# Altium PCB PCB1.PcbDoc
Units mm, origin at the board's own origin, x right, y up, seen from the top; angles counter-clockwise.
Board outline 42.85 x 42.85 mm, 4 copper layers (Component Side, Ground Plane, Power Plane, Solder Side), stack 0.844 mm thick; 31 components, 23 nets, 109 pads, 268 vias.
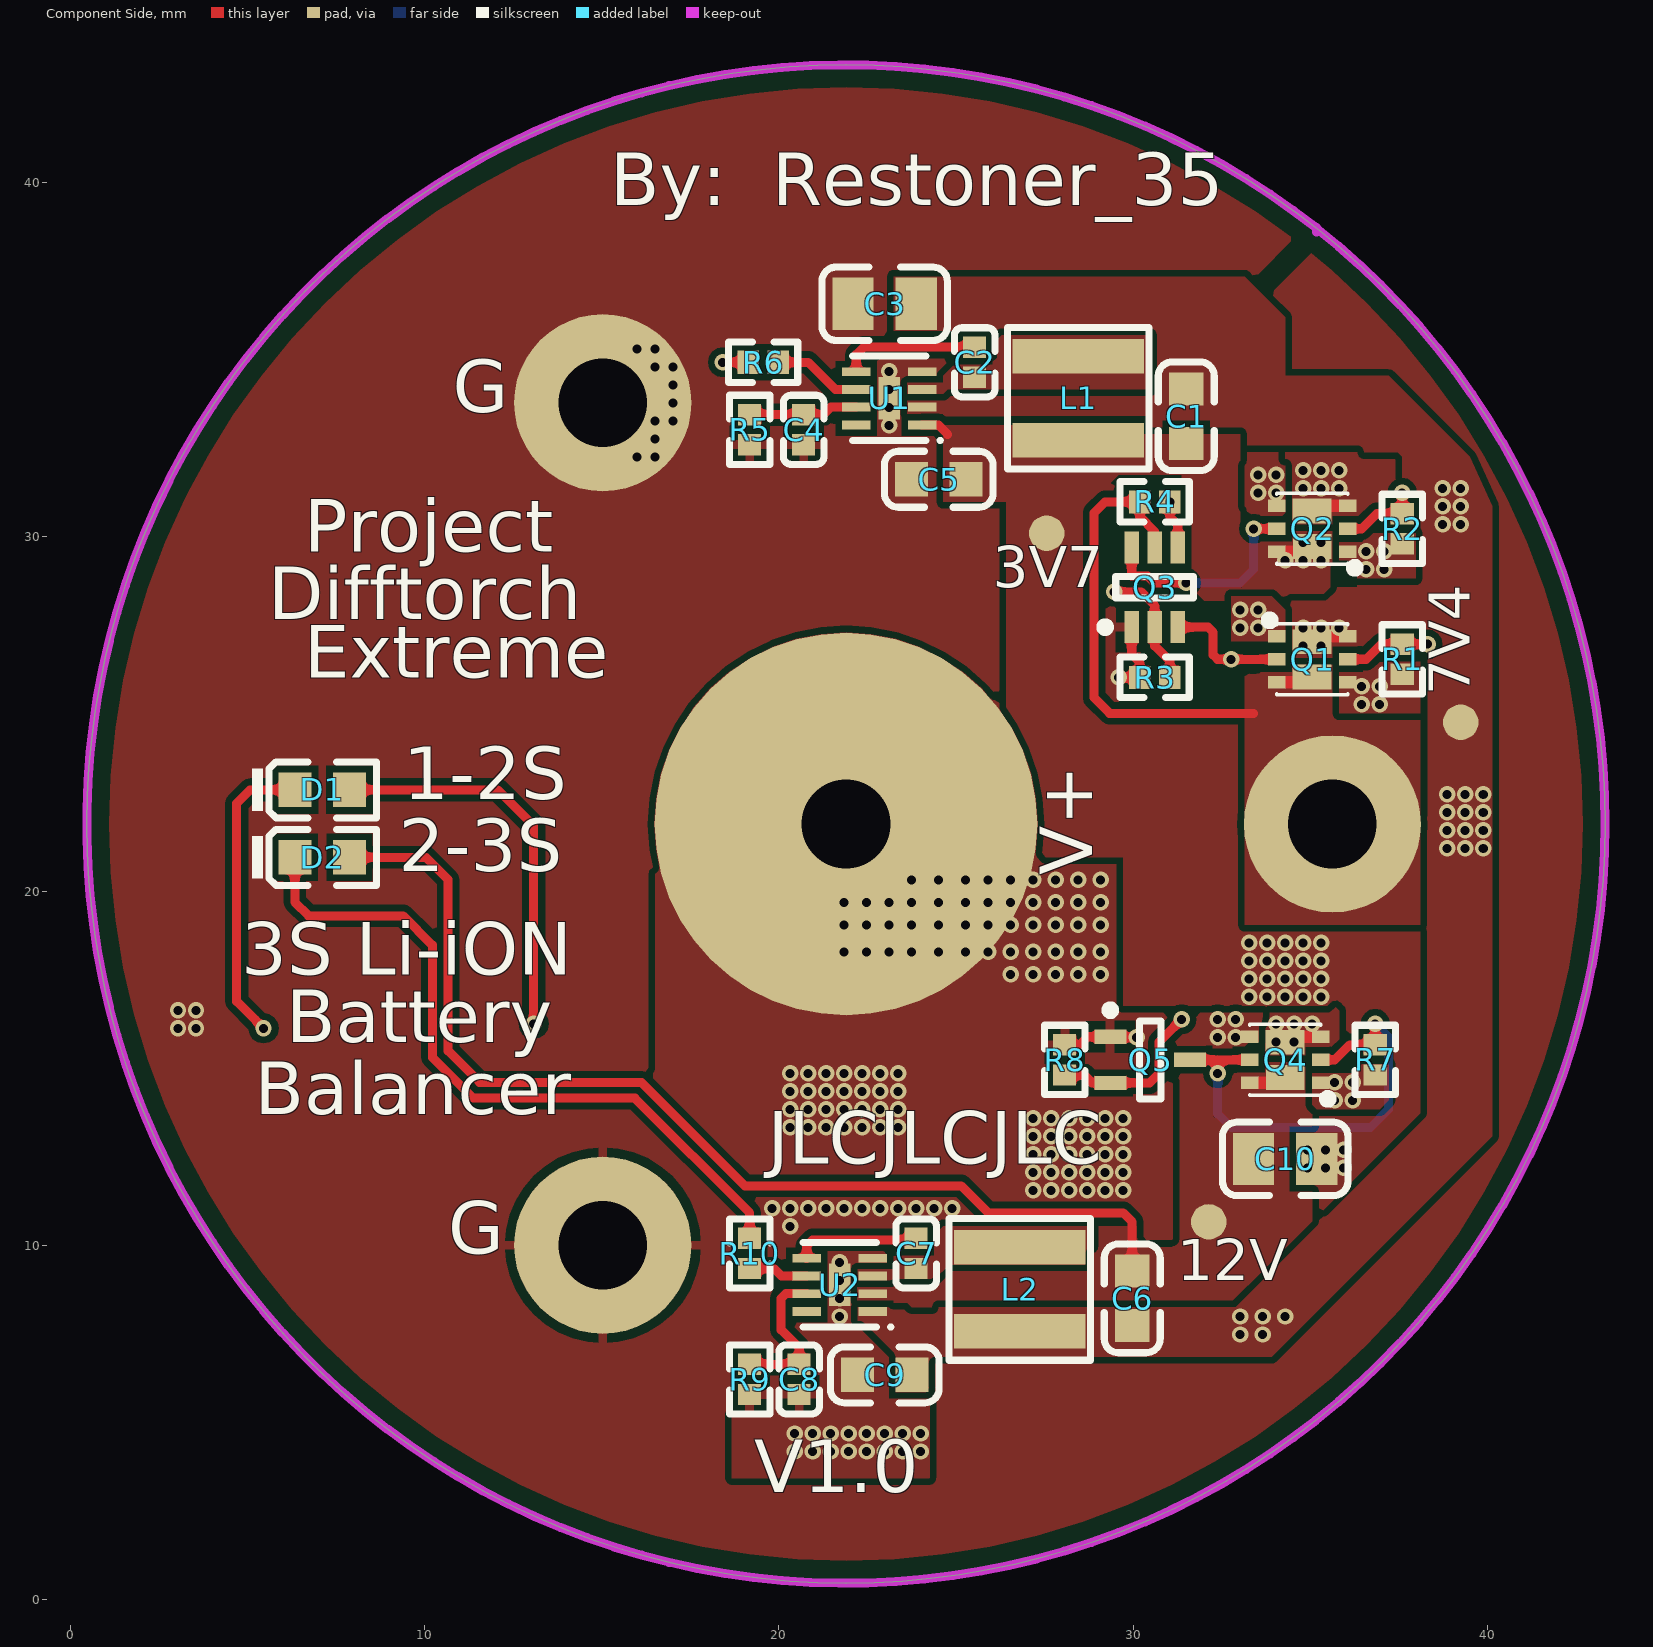
[diagram p0: Component Side view]
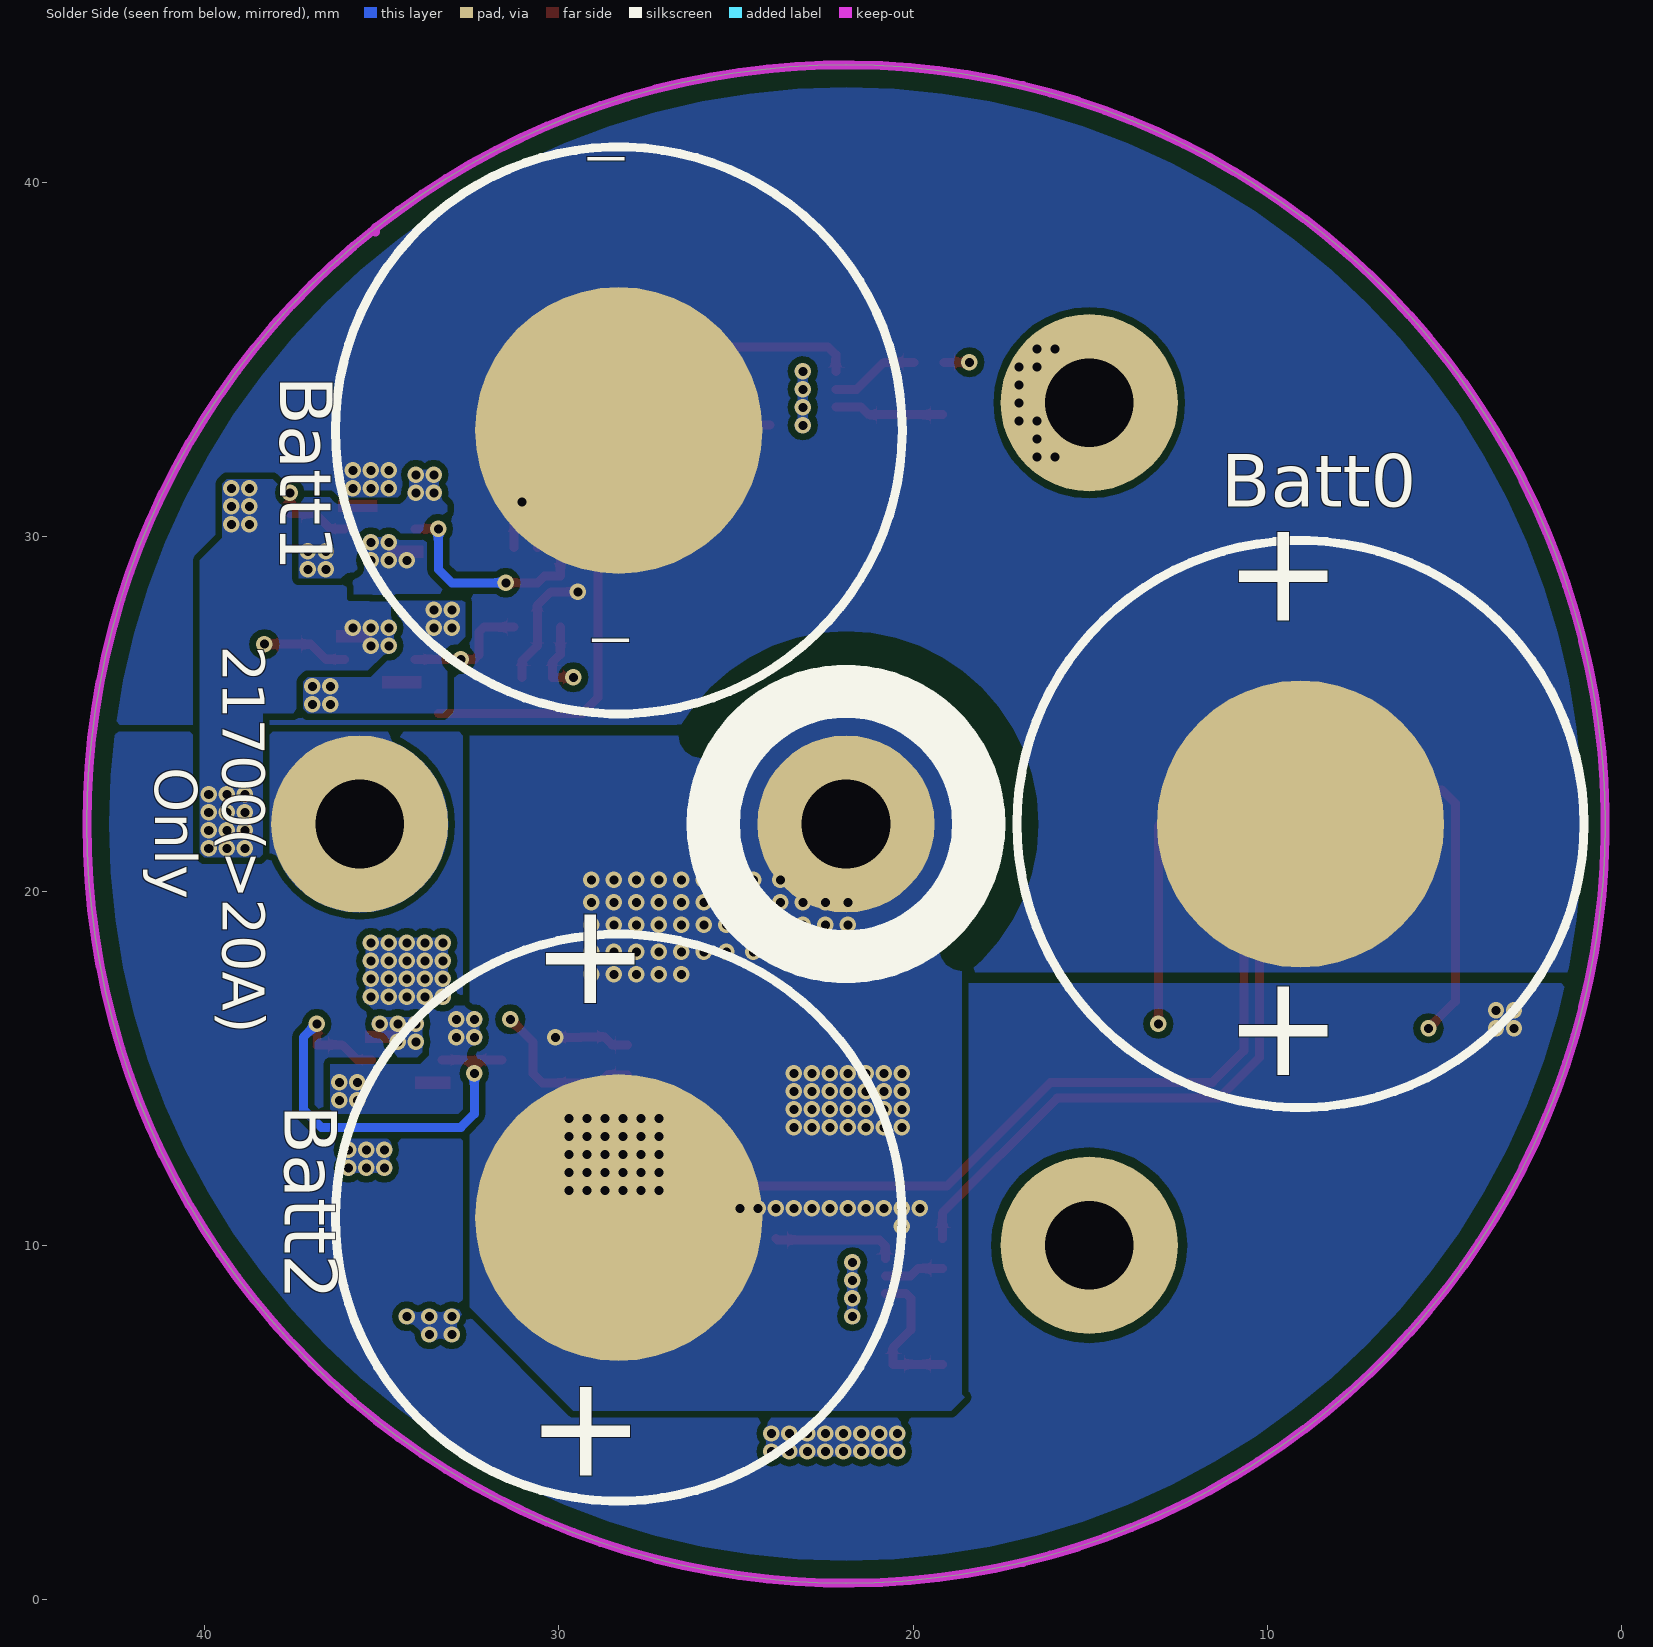
[diagram p1: Solder Side view, seen from below]
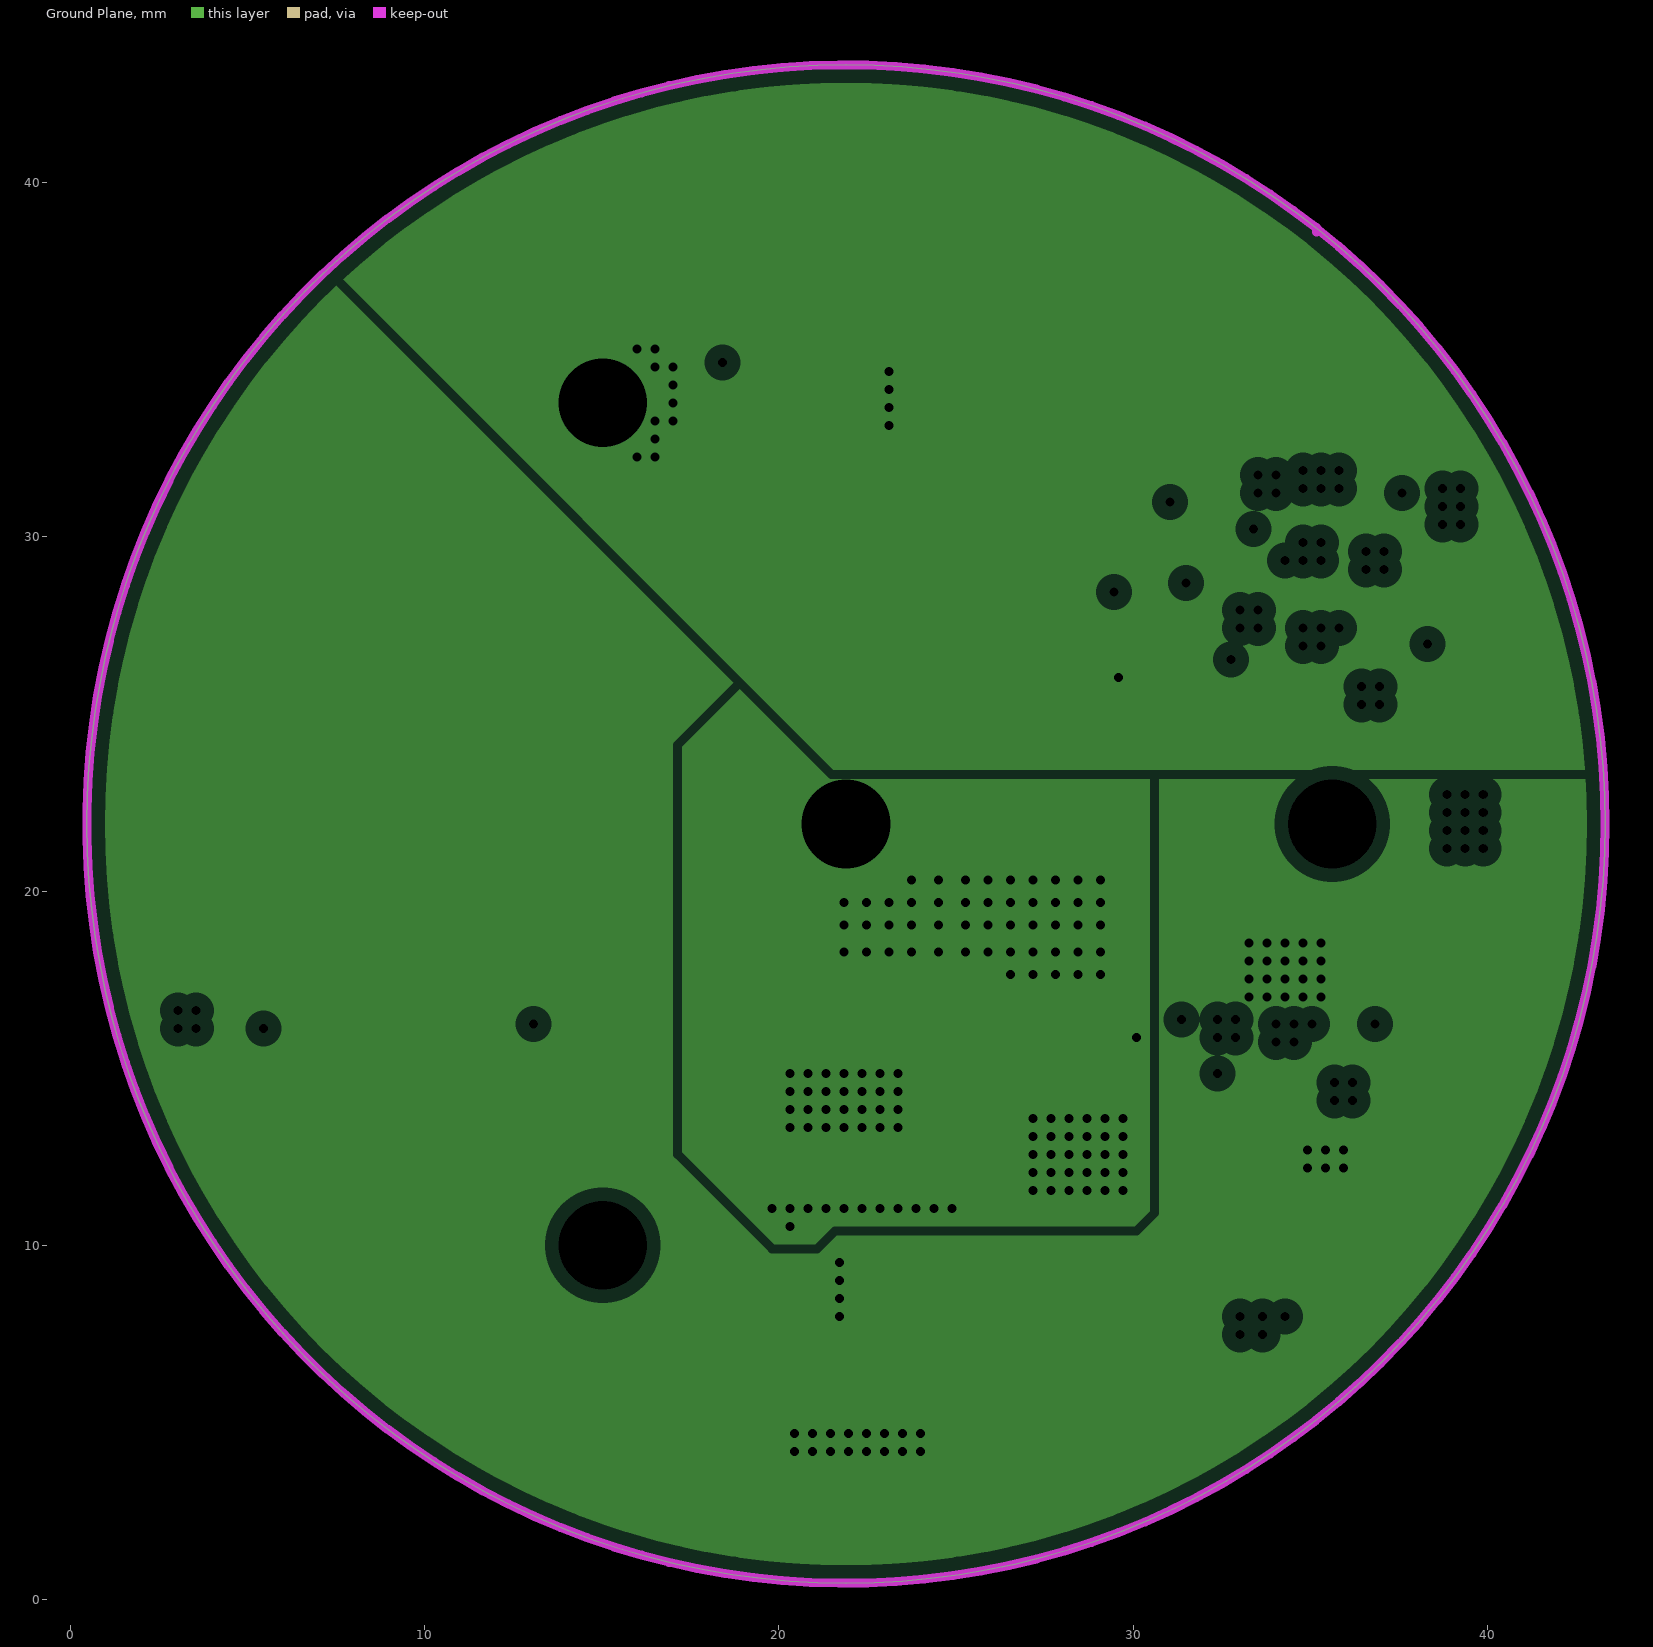
[diagram p2: Ground Plane, clearances drawn from the general rule]
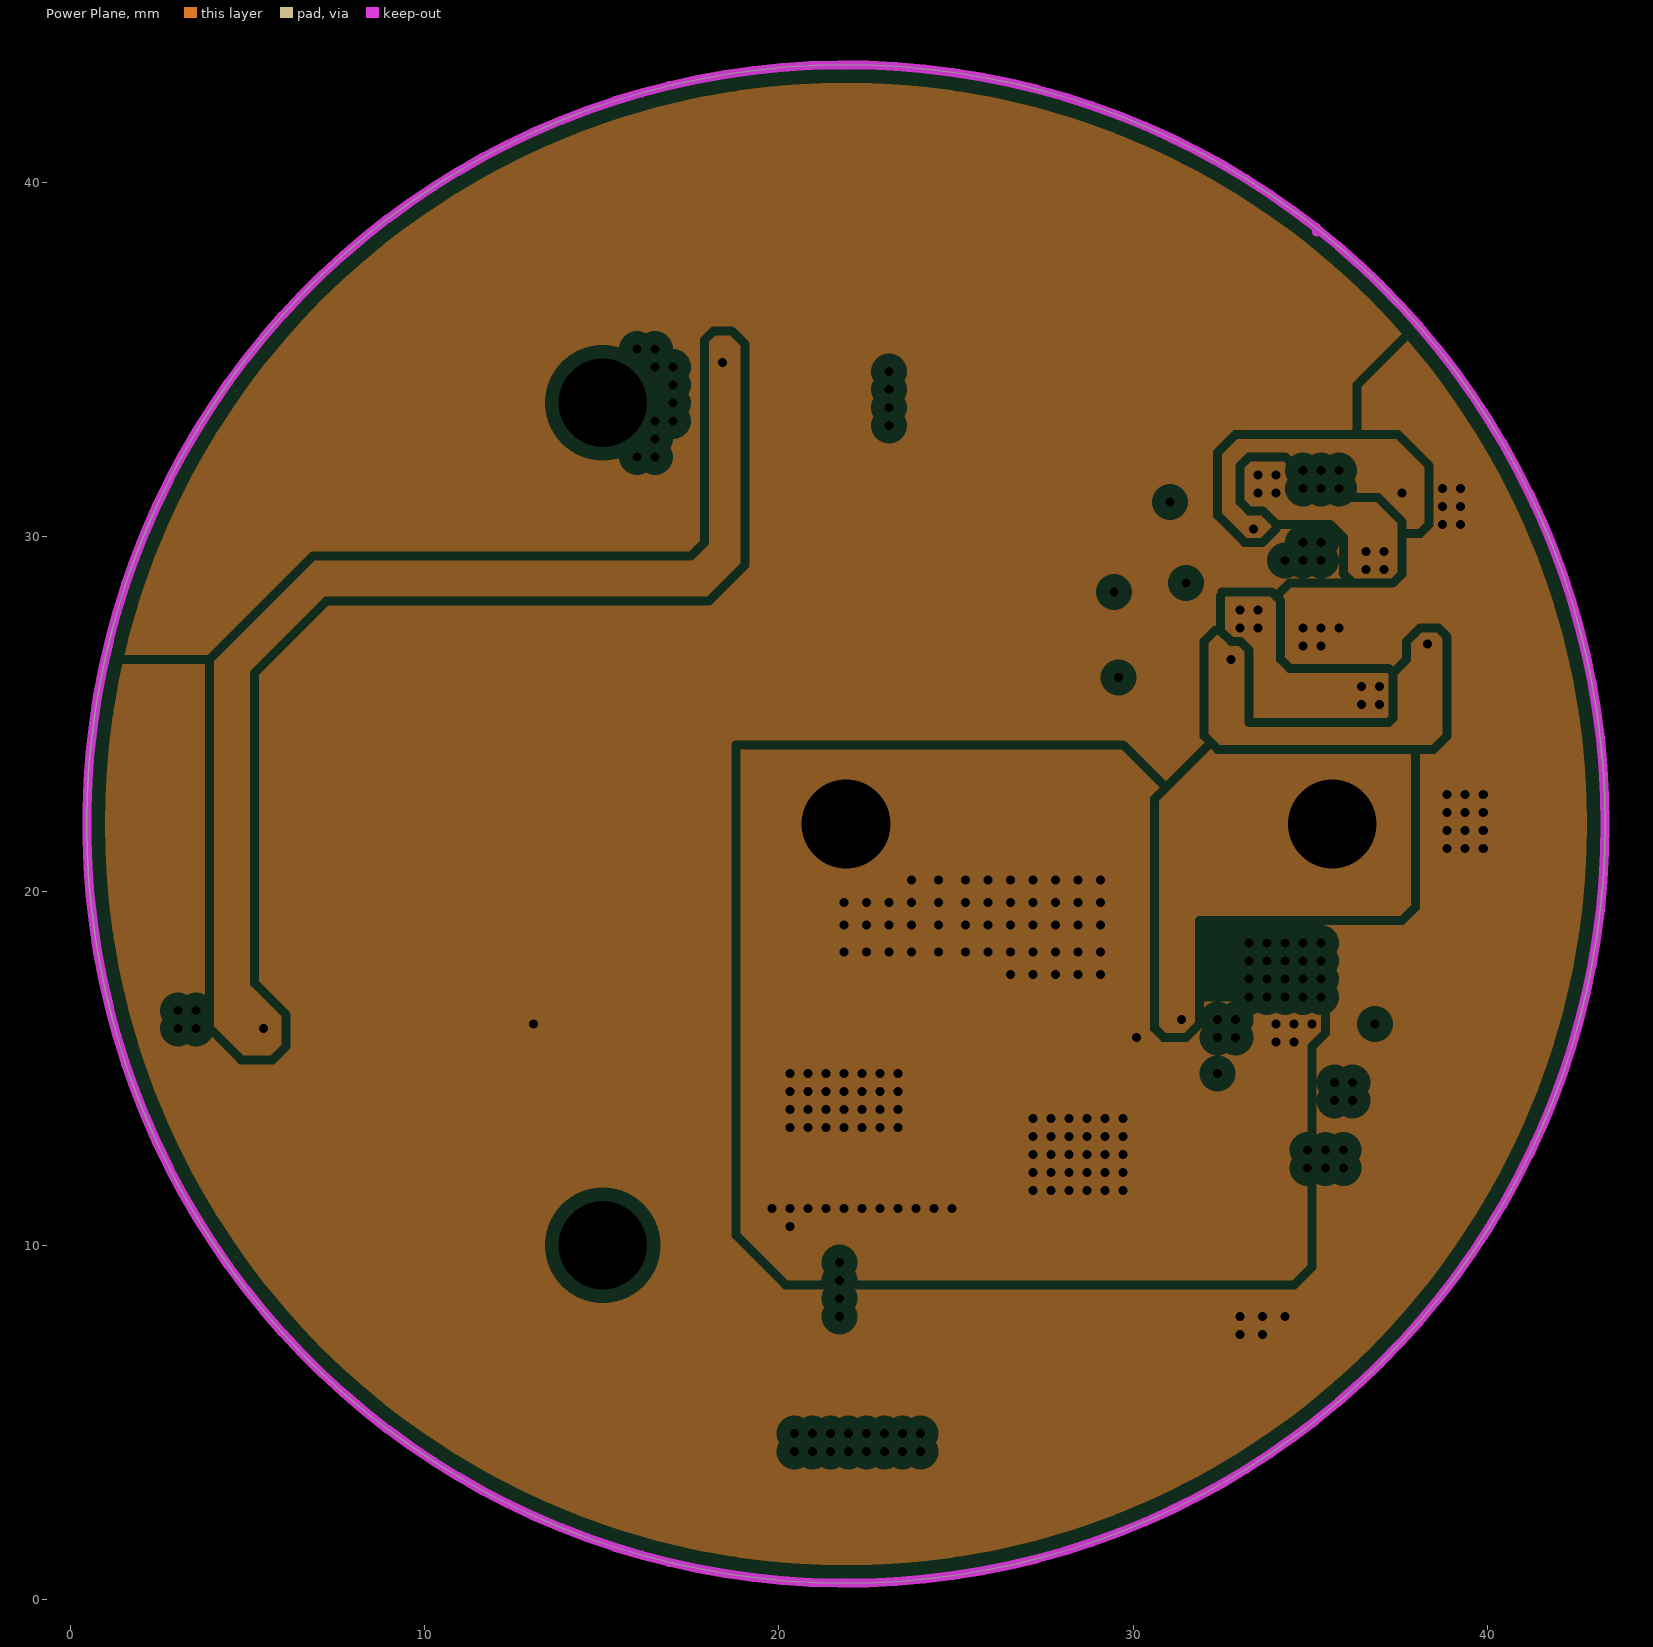
[diagram p3: Power Plane, clearances drawn from the general rule]
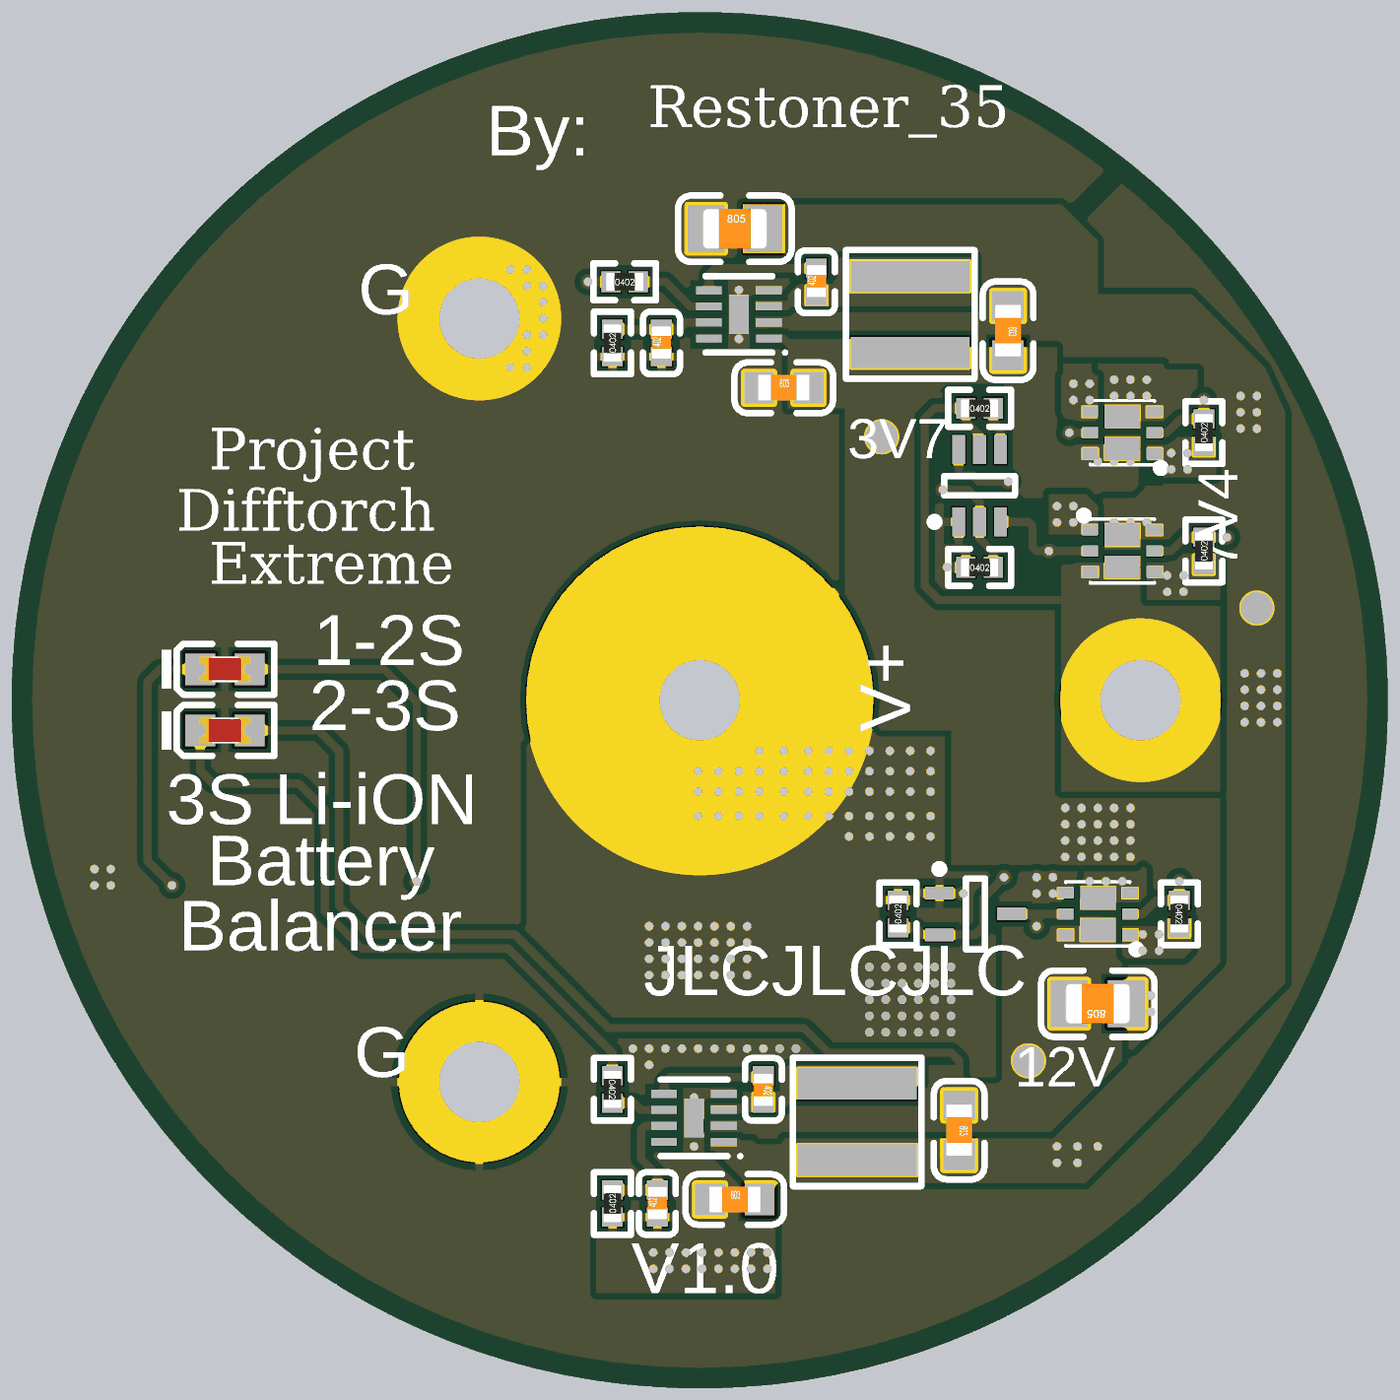
[diagram p4: 3D render of the assembled board from above, using the file's embedded part models]

## Layer stack, top to bottom
Top Solder: solder mask 0.0102, Solder Resist, Dk 3.5
Component Side: signal copper 0.0356
Dielectric 1: core 0.32, FR-4, Dk 4.8
Ground Plane: plane copper 0.036, net (Multiple Nets)
Dielectric 3: prepreg 0.127, Dk 4.2
Power Plane: plane copper 0.036, net CELL2
Dielectric 4: core 0.254, Dk 4.2
Solder Side: signal copper 0.0356
Bottom Solder: solder mask 0.0102, Solder Resist, Dk 3.5

## Board outline
21.895,0.47 cw(c21.895,21.895) 0.47,21.895 cw(c21.895,21.895) 21.895,43.32 cw(c21.895,21.895) 43.32,21.895 cw(c21.895,21.895)

## Design rules (kind name [scope] priority, off if disabled: settings)
Clearance Clearance_1 [IsArc] p1: gap=0.508
Clearance [All] p2: gap=0.191
PlaneClearance [All] p1: clearance=0.381
PlaneConnect [All] p1: planeconnectstyle=Direct reliefexpansion=0.508 reliefentries=4 reliefconductorwidth=0.254 reliefairgap=0.254
PolygonConnect PolygonConnect_1 [IsVia] p1: connectstyle=Direct reliefconductorwidth=0.254 reliefentries=4 polygonreliefangle="90 Angle" airgapwidth=0.254
PolygonConnect [All] p2: connectstyle=Relief reliefconductorwidth=0.254 reliefentries=4 polygonreliefangle="90 Angle" airgapwidth=0.254
RoomDefinition main [InComponentClass('main')] p1: confinementstyle=ConfineIn formatcopy=TRUE lockcomponents=FALSE outline 44.958,1.397 73.914,1.397 73.914,7.366 44.958,7.366
RoutingVias [All] p1: holewidth=0.711 width=1.27 viastyle="Through Hole" minholewidth=0.711 minwidth=1.27 maxholewidth=0.711 maxwidth=1.27
SolderMaskExpansion [All] p1: expansion=0.102
Width [All] p1: maxlimit=5.08 minlimit=0.203 preferedwidth=0.254
28 further rules are at their usual default settings.

## Components (designator, comment, footprint, x,y, rotation, side; value= is the part's Value field where it differs from the comment)
C1 "10uF (106) 10% 10V" 0603_C 31.496,33.401 r270 top
C2 "10nF (103) 10% 50V" 0402_C 25.527,34.925 r90 top
C3 "22uF (226) 20% 25V" 0805_C 22.987,36.576 r0 top
C4 "1nF (102) 10% 50V" 0402_C 20.701,33.02 r90 top
C5 "10uF (106) 10% 10V" 0603_C 24.511,31.623 r0 top
C6 "10uF (106) 10% 10V" 0603_C 29.972,8.509 r270 top
C7 "10nF (103) 10% 50V" 0402_C 23.876,9.779 r270 top
C8 "1nF (102) 10% 50V" 0402_C 20.574,6.223 r90 top
C9 "10uF (106) 10% 10V" 0603_C 22.987,6.35 r0 top
C10 "22uF (226) 20% 25V" 0805_C 34.29,12.446 r180 top
D1 "白灯 0603" 0603_LED_S1 7.112,22.86 r0 top
D2 "白灯 0603" 0603_LED_S1 7.112,20.955 r0 top
L1 "XAL4020-222ME" XAL4020-xxxME 28.448,33.909 r270 top
L2 "XAL4020-222ME" XAL4020-xxxME 26.797,8.763 r270 top
Q1 "NTLUD3A50PZ" UDFN-6_L2.0-W2.0-P0.65-BL_NTLUD3A50PZ 35.052,26.543 r270 top
Q2 "NTLUD3A50PZ" UDFN-6_L2.0-W2.0-P0.65-BL_NTLUD3A50PZ 35.052,30.226 r90 top
Q3 "2N7002DW" SC70-6 30.607,28.575 r90 top
Q4 "NTLUD3A50PZ" UDFN-6_L2.0-W2.0-P0.65-BL_NTLUD3A50PZ 34.29,15.24 r90 top
Q5 "2N7002KW" SC70-3 30.48,15.24 r0 top
R1 "68KΩ (6802) ±1%" 0402_R 37.592,26.543 r90 top
R2 "68KΩ (6802) ±1%" 0402_R 37.592,30.226 r90 top
R3 "1MΩ (1004) ±1%" 0402_R 30.607,26.035 r0 top
R4 "1MΩ (1004) ±1%" 0402_R 30.607,30.988 r0 top
R5 "25KΩ (2502) ±1%" 0402_R 19.177,33.02 r90 top
R6 "3.3KΩ (3301) ±1%" 0402_R 19.558,34.925 r0 top
R7 "68KΩ (6802) ±1%" 0402_R 36.83,15.24 r270 top
R8 "1MΩ (1004) ±1%" 0402_R 28.067,15.24 r90 top
R9 "25KΩ (2502) ±1%" 0402_R 19.177,6.223 r90 top
R10 "3.3KΩ (3301) ±1%" 0402_R 19.177,9.779 r270 top
U1 "ETA3000D2I" DFN2x2-8L 23.114,33.909 r180 top
U2 "ETA3000D2I" DFN2x2-8L 21.717,8.89 r180 top

## Footprints (in the part's own frame and the unit in brackets; to place one, negate y for a bottom-side part, rotate by r counter-clockwise, add the part's x,y. Pads: shape width x height; smd on the part's side, far side on the other; paste and mask are expansions set on the pad)
0402_C [mm]
  rect 0.6x0.65 smd mask+0.051: 1(-0.425,0) 2(0.425,0)
  silkscreen extent -0.97,-0.58 0.97,0.58, body extent -0.48,-0.3 0.52,0.3, height 0.2
0402_R [mm]
  rect 0.6x0.65 smd mask+0.051: 1(-0.425,0) 2(0.425,0)
  silkscreen extent -0.97,-0.58 0.97,0.58, body extent -0.57,-0.27 0.58,0.28, height 0.41
0603_C [mm]
  rect 0.93x0.98 smd: 1(-0.77,0) 2(0.77,0)
  silkscreen extent -1.53,-0.79 1.54,0.79, body extent -0.8,-0.4 0.8,0.4, height 0.3
0603_LED_S1 [mm]
  rect 0.93x0.98 smd: A(0.77,0) K(-0.77,0)
  silkscreen extent -1.97,-0.79 1.54,0.79, body extent -0.8,-0.4 0.8,0.4, height 0.6
0805_C [mm]
  rect 1.16x1.47 smd: 1(-0.89,0) 2(0.89,0)
  silkscreen extent -1.77,-1.04 1.77,1.04, body extent -1,-0.62 1,0.63, height 0.77
DFN2x2-8L [mm] "SON, 8-Leads, Body 2.00x2.00mm, Pitch 0.50mm, Thermal Pad 1.20x0.60mm, IPC Medium Density"
  rect 0.8x0.25 smd mask+0.01: 1(-0.93,0.75) 2(-0.93,0.25) 3(-0.93,-0.25) 4(-0.93,-0.75) 5(0.93,-0.75) 6(0.93,-0.25) 7(0.93,0.25) 8(0.93,0.75)
  rect 0.6x1.2 smd mask+0.01: 9(0,0)
  silkscreen extent -1.49,-1.19 1.04,1.24, body extent -1.04,-1.04 1.04,1.04, height 0.8
SC70-3 [mm] "3 Lead SC70(SOT-323) package for small Transistor"
  rect 0.9x0.4 smd mask+0.05: 1(-1.125,0.65) 2(-1.125,-0.65) 3(1.125,0)
  silkscreen extent -1.25,-1.1 0.3,1.52, body extent -0.67,-1.1 0.67,1.1, height 1.1
SC70-6 [mm] "SOT23, 6-Leads, Body 2.00x2.10mm, Pitch 0.65mm, IPC Medium Density"
  rect 0.9x0.4 smd mask+0.05: 1(-1.125,0.65) 2(-1.125,0) 3(-1.125,-0.65) 4(1.125,-0.65) 5(1.125,0) 6(1.125,0.65)
  silkscreen extent -1.25,-1.1 0.3,1.52, body extent -0.67,-1.1 0.67,1.1, height 1.1
UDFN-6_L2.0-W2.0-P0.65-BL_NTLUD3A50PZ [mm]
  rect 0.35x0.495 smd mask+0.03: 1(-0.65,-1.001) 2(0,-1.001) 3(0.65,-1.001) 4(0.65,1.001) 5(0,1.001) 6(-0.65,1.001)
  rect 0.7x1.1 smd mask+0.03: 3(0.498,0) 6(-0.498,0)
  Component Side region: 0.475,-1.174 0.826,-1.174 0.826,-0.06 0.475,-0.06
  Component Side region: -0.826,0.226 -0.476,0.226 -0.476,1.239 -0.826,1.239
  silkscreen extent -1.22,-1.32 1,1, body extent -1.02,-1.02 1.02,1.02, height 0.55
XAL4020-xxxME [mm] "CoilCraft Molded inductor 4x4mm,2mm height"
  rect 0.98x3.7 smd mask+0.05: 1(-1.185,0) 2(1.185,0)
  silkscreen extent -2,-2 2,2, body extent -2.03,-2.03 2.03,2.03, height 2

## Part data
C1 C5 C6 C9: library part "0603 10uF (106) 10% 10V", "贴片电容"
C2 C7: library part "0402 10nF (103) 10% 50V", "贴片电容"
C3 C10: library part "0805 22uF (226) 20% 25V", "贴片电容"
C4 C8: library part "0402 1nF (102) 10% 50V", "贴片电容"
D1 D2: library part "0603 白灯", "发光二极管"
L1 L2: library part "Inductor Iron", "Coilcraft XAL4020 Series"
Q1 Q2 Q4: "Dual Symmetric P-MOS -20V -5.6A"
Q3: "Dual N-Channel MOSFET 60V340mA SOT-363"
Q5: library part "2N7002 7002", "MOS(场效应管)"
R1 R2 R7: library part "0402 68KΩ (6802) 1%", "贴片电阻"
R3 R4 R8: library part "0402 1MΩ (1004) 1%", "贴片电阻"
R5 R9: library part "0402 20KΩ (2002) 1%", "贴片电阻"
R6 R10: library part "0402 3.3KΩ (3301) 1%", "贴片电阻"
U1 U2: "2串锂电池电感主动均衡芯片,DFN2*2封装 2A均衡电流"

## Free pads (board coordinates)
  round 5 hole 2.5 mask+0.05: 0(15.032,33.781) 1(35.62,21.895) 2(15.033,10.009)
  round 1 smd mask+0.05: 0(27.559,30.099) 1(39.243,24.765) 2(32.131,10.668)
  round 10.8 / inner round 5 / far side round 5 hole 2.5 mask+0.05: 3(21.895,21.895)
  round 8.1 smd far side mask+0.05: 4(28.307,33.002) 5(9.07,21.895) 6(28.308,10.788)

## Via types
v1: diameter 0.457, hole 0.254, Component Side to Solder Side, tented both sides, 268 vias

## Nets (pads, with @x,y where several pads share a name; then routed paths per layer and width w, separated by ;. In a path a pad name is that pad's centre, name@x,y a point inside that pad or via, vN(x,y) a via of type N, cw(c..) or ccw(c..) an arc to the next point about the centre after c; other vN are vias at no path point)
3.7V: pad.4 pad.5 Q2.3 Q3.2 Q3.4 R3.2 R4.2 | length 4.9
  Component Side w0.254: v1(29.464,28.448) 30.226,28.448 30.607,28.067 Q3.2 30.607,26.924 31.032,26.499 R3.2 ; v1(31.032,30.988) 31.032,30.563 31.257,30.338 Q3.4
  other v1: 34.798,31.369 35.306,31.369 35.814,31.369 34.798,31.877 35.306,31.877 35.814,31.877
7.4V: pad.1@35.62,21.895 Q1.3 Q3.5 Q5.2 R4.1 R8.1 | length 17.4
  Component Side w0.254: R8.1 28.619,14.815 28.844,14.59 Q5.2 30.465,14.59 30.734,14.859 30.734,15.748 v1(31.369,16.383) ; Q3.5 30.607,30.149 30.182,30.574 R4.1 29.21,30.988 28.894,30.672 28.894,25.462 29.337,25.019 33.401,25.019
12V: pad.3 pad.6 Q4.3 Q5.1 R8.2 | length 2.1
  Component Side w0.254: R8.2 28.492,15.665 28.717,15.89 Q5.1 ; Q5.1@29.37,15.875 v1(30.099,15.875)
  other v1: 20.32,10.541 19.812,11.049 20.32,11.049 20.828,11.049 21.336,11.049 21.844,11.049 22.352,11.049 22.86,11.049 23.368,11.049 23.876,11.049 24.384,11.049 24.892,11.049 27.178,11.557 27.686,11.557 28.194,11.557 28.702,11.557 29.21,11.557 29.718,11.557 27.178,12.065 27.686,12.065 28.194,12.065 28.702,12.065 29.21,12.065 29.718,12.065 27.178,12.573 27.686,12.573 28.194,12.573 28.702,12.573 29.21,12.573 29.718,12.573 27.178,13.081 27.686,13.081 28.194,13.081 28.702,13.081 29.21,13.081 29.718,13.081 20.32,13.335 20.828,13.335 21.336,13.335 21.844,13.335 22.352,13.335 22.86,13.335 23.368,13.335 27.178,13.589 27.686,13.589 28.194,13.589 28.702,13.589 29.21,13.589 29.718,13.589 20.32,13.843 20.828,13.843 21.336,13.843 21.844,13.843 22.352,13.843 22.86,13.843 23.368,13.843 20.32,14.351 20.828,14.351 21.336,14.351 21.844,14.351 22.352,14.351 22.86,14.351 23.368,14.351 20.32,14.859 20.828,14.859 21.336,14.859 21.844,14.859 22.352,14.859 22.86,14.859 23.368,14.859 34.036,15.748 34.544,15.748 34.036,16.256 34.544,16.256 35.052,16.256 26.543,17.653 27.178,17.653 27.813,17.653 28.448,17.653 29.083,17.653 21.844,18.288 22.479,18.288 23.114,18.288 23.749,18.288 24.511,18.288 25.273,18.288 25.908,18.288 26.543,18.288 27.178,18.288 27.813,18.288 28.448,18.288 29.083,18.288 21.844,19.05 22.479,19.05 23.114,19.05 23.749,19.05 24.511,19.05 25.273,19.05 25.908,19.05 26.543,19.05 27.178,19.05 27.813,19.05 28.448,19.05 29.083,19.05 21.844,19.685 22.479,19.685 23.114,19.685 23.749,19.685 24.511,19.685 25.273,19.685 25.908,19.685 26.543,19.685 27.178,19.685 27.813,19.685 28.448,19.685 29.083,19.685 23.749,20.32 24.511,20.32 25.273,20.32 25.908,20.32 26.543,20.32 27.178,20.32 27.813,20.32 28.448,20.32 29.083,20.32
BST1: C2.2 U1.5 | length 3.9
  Component Side w0.254: U1.5 22.184,35.138 22.396,35.35 C2.2
BST2: C7.1 U2.5 | length 3.5
  Component Side w0.254: U2.5 20.787,9.992 20.955,10.16 23.832,10.16 C7.1
CELL1: C1.2 C5.2 C8.1 C9.1 C10.1 L1.2 pad.0@27.559,30.099 Q2.6 R9.1 U1.1 U2.4 U2.9 | length 0.8
  Component Side w0.254: U1.1 24.499,33.159 24.765,32.893
  other v1: 20.447,4.191 20.955,4.191 21.463,4.191 21.971,4.191 22.479,4.191 22.987,4.191 23.495,4.191 24.003,4.191 20.447,4.699 20.955,4.699 21.463,4.699 21.971,4.699 22.479,4.699 22.987,4.699 23.495,4.699 24.003,4.699 21.717,8.001 21.717,8.509 21.717,9.017 21.717,9.525 34.925,12.192 35.433,12.192 35.941,12.192 34.925,12.7 35.433,12.7 35.941,12.7 33.274,17.018 33.782,17.018 34.29,17.018 34.798,17.018 35.306,17.018 33.274,17.526 33.782,17.526 34.29,17.526 34.798,17.526 35.306,17.526 33.274,18.034 33.782,18.034 34.29,18.034 34.798,18.034 35.306,18.034 33.274,18.542 33.782,18.542 34.29,18.542 34.798,18.542 35.306,18.542 34.29,29.337 34.798,29.337 35.306,29.337 34.798,29.845 35.306,29.845
CELL2: C1.1 C3.2 C6.2 C9.2 D1.A L2.2 pad.1@39.243,24.765 Q1.6 U1.2 U2.1 | length 11.2
  Component Side w0.254: D1.A 12.065,22.86 13.081,21.844 v1(13.081,16.256)
  other v1: 33.02,7.493 33.655,7.493 33.02,8.001 33.655,8.001 34.29,8.001 38.862,21.209 39.37,21.209 39.878,21.209 38.862,21.717 39.37,21.717 39.878,21.717 38.862,22.225 39.37,22.225 39.878,22.225 38.862,22.733 39.37,22.733 39.878,22.733 34.798,26.924 35.306,26.924 34.798,27.432 35.306,27.432 35.814,27.432 38.735,30.353 39.243,30.353 38.735,30.861 39.243,30.861 38.735,31.369 39.243,31.369
CELL3: C6.1 C10.2 D2.A pad.2@32.131,10.668 Q4.6 U2.2 | length 30.6
  Component Side w0.254: D2.A 10.037,20.955 10.668,20.324 10.668,15.494 11.557,14.605 16.123,14.605 19.044,11.684 25.146,11.684 25.908,10.922 29.718,10.922 29.972,10.668 C6.1
G3.7: Q2.2 Q2.5 Q3.6 R2.2 | length 8.6
  Component Side w0.254: Q3.6 29.957,28.892 30.41,28.892 30.601,28.702 v1(31.496,28.702) ; v1(33.401,30.226) Q2.5 ; Q2.2 36.449,30.226 36.874,30.651 R2.2 v1(37.592,31.242)
  Solder Side w0.254: v1(31.496,28.702) 33.02,28.702 33.401,29.083 v1(33.401,30.226)
G7.4: Q1.2 Q1.5 Q3.3 R1.2 | length 6
  Component Side w0.254: Q3.3 32.113,27.45 32.258,27.305 32.258,26.67 32.385,26.543 v1(32.766,26.543) Q1.2 ; Q1.5 36.576,26.543 37.001,26.968 R1.2 v1(38.31,26.968)
G12: Q4.2 Q4.5 Q5.3 R7.1 | length 13.3
  Component Side w0.254: Q5.3 32.385,15.24 ; v1(32.385,14.859) 32.385,15.24 ; Q4.5 32.385,15.24 ; Q4.2 35.687,15.24 36.112,15.665 R7.1 v1(36.83,16.256)
  Solder Side w0.254: v1(32.385,14.859) 32.385,13.716 32.766,13.335 36.703,13.335 37.211,13.843 37.211,15.875 v1(36.83,16.256)
GND: C3.1 C4.1 C5.1 pad.0@15.032,33.781 pad.2@15.033,10.009 Q3.1 R3.1 R5.1 U1.4 U1.9 | length 2.1
  Component Side w0.254: v1(29.591,26.035) R3.1 30.182,26.46 29.957,26.685 Q3.1
  other v1: 3.048,16.129 3.556,16.129 3.048,16.637 3.556,16.637 16.002,32.258 16.51,32.258 16.51,32.766 23.114,33.147 16.51,33.274 17.018,33.274 23.114,33.655 17.018,33.782 23.114,34.163 17.018,34.29 23.114,34.671 16.51,34.798 17.018,34.798 16.002,35.306 16.51,35.306
NetC4_2: C4.2 R5.2 U1.7 | length 3.1
  Component Side w0.254: R5.2 C4.2 21.253,33.445 21.467,33.659 U1.7
NetC8_2: C8.2 R9.2 U2.7 | length 4.2
  Component Side w0.254: R9.2 C8.2 20.574,7.112 20.066,7.62 20.066,8.509 20.197,8.64 U2.7
NetD1_K: D1.K R6.1 | length 9.2
  Component Side w0.254: v1(5.461,16.129) 4.699,16.891 4.699,22.479 5.08,22.86 D1.K ; v1(18.415,34.925) R6.1
NetD2_K: D2.K R10.1 | length 20.3
  Component Side w0.254: D2.K 6.342,19.693 6.731,19.304 9.398,19.304 10.223,18.479 10.223,15.31 11.373,14.16 15.938,14.16 19.177,10.922 R10.1
S3.7: Q2.1 Q2.4 R2.1
  other v1: 36.576,29.083 37.084,29.083 36.576,29.591 37.084,29.591 33.528,31.242 34.036,31.242 33.528,31.75 34.036,31.75
S7.4: Q1.1 Q1.4 R1.1
  other v1: 36.449,25.273 36.957,25.273 36.449,25.781 36.957,25.781 33.02,27.432 33.528,27.432 33.02,27.94 33.528,27.94
S12: Q4.1 Q4.4 R7.2
  other v1: 35.687,14.097 36.195,14.097 35.687,14.605 36.195,14.605 32.385,15.875 32.893,15.875 32.385,16.383 32.893,16.383
STAT1: R6.2 U1.6 | length 2.5
  Component Side w0.254: R6.2 20.828,34.925 21.594,34.159 U1.6
STAT2: R10.2 U2.6 | length 1.7
  Component Side w0.254: R10.2 19.856,9.354 20.07,9.14 U2.6
SW1: C2.1 L1.1 U1.3
SW2: C7.2 L2.1 U2.3
pads on no net: U1.8 U2.8

## Polygon pours and split planes (outlines as drawn)
CELL2 on Solder Side "Component Side-No Net 1" (solid, remove dead copper, pour order 120): 32.512,9.017 32.512,6.604 34.798,6.604 34.925,6.731 35.433,7.239 35.433,9.525
CELL1 on Solder Side "Component Side-No Net 1" (solid, remove dead copper, pour order 109): 18.923,5.715 25.908,5.715 26.162,5.461 26.162,3.556 19.05,3.556 18.288,2.794
CELL1 on Solder Side "Component Side-No Net 1" (solid, remove dead copper, pour order 107): 33.782,13.081 37.465,13.081 37.465,11.684 37.211,11.43 36.83,11.049 33.528,11.049
12V on Solder Side "Component Side-No Net 1" (solid, remove dead copper, pour order 105): 33.065,16.923 36.01,16.923 36.467,16.466 36.449,16.449 36.449,15.307 32.914,15.307 32.719,15.113
CELL1 on Solder Side "Component Side-No Net 1" (solid, remove dead copper, pour order 103): 32.706,19.229 37.032,19.229 37.211,19.05 37.465,18.796 37.465,16.637 32.309,16.637 32.189,16.756 32.004,16.942 32.004,19.177
7.4V on Solder Side "Component Side-No Net 1" (solid, remove dead copper, pour order 101): 33.782,24.765 39.116,24.765 39.116,20.193 38.481,19.558 38.152,19.229 36.042,19.229 33.534,19.229 33.274,18.969 32.893,19.35 32.893,24.638
GND on Solder Side "Component Side-No Net 1" (solid, remove dead copper, pour order 99): 1.397,17.399 18.669,17.399 18.796,17.526 18.923,17.399 18.923,5.588 29.845,5.588 30.056,5.799 32.512,8.255 32.512,25.019 32.639,25.146 32.893,25.4 44.577,25.654 44.577,6.35 44.704,6.223 36.703,-1.778 29.718,-1.778 3.556,-1.778 2.032,-0.254
CELL1 on Solder Side "Component Side-No Net 1" (solid, remove dead copper, pour order 87): 20.193,11.176 20.32,11.049 23.114,11.049 23.114,7.239 22.733,6.858 22.606,6.731 19.939,6.731
S12 on Solder Side "Component Side-No Net 1" (solid, remove dead copper, pour order 69): 31.99,16.547 31.99,16.593 32.083,16.685 32.162,16.764 33.274,16.764 33.528,16.764 33.655,16.637 33.655,15.875 33.655,15.367 33.782,15.24 33.909,15.113 36.195,15.113 36.449,15.113 36.449,14.859 36.449,14.351 36.068,13.97 34.29,13.97 32.004,13.97
S12 on Solder Side "Component Side-No Net 1" (solid, remove dead copper, pour order 67): 32.083,15.573 32.312,15.573 32.512,15.373 32.512,13.716 36.322,13.716 36.449,13.843 36.449,14.859 34.29,14.859 33.528,14.859 33.274,14.859 33.147,14.986 33.147,16.51 33.02,16.637 31.623,16.637 31.623,15.113 31.496,14.986 31.496,15.24
12V on Solder Side "Component Side-No Net 1" (solid, remove dead copper, pour order 59): 25.982,24.401 25.999,24.384 32.512,24.384 32.512,8.255 29.591,5.334 24.638,5.334 18.923,5.334 18.542,5.715 18.626,5.799 18.626,18.388 17.172,18.388 15.113,20.447 14.859,20.701 14.859,26.797 15.494,26.797 17.526,28.829 18.034,29.337 26.162,29.337 25.908,29.083
CELL1 on Solder Side "Component Side-No Net 1" (solid, remove dead copper, pour order 57): 32.385,30.353 32.56,30.528 37.338,30.528 37.338,27.94 37.465,27.813 37.338,27.686 31.623,27.686 31.623,29.845 31.242,30.226
3.7V on Solder Side "Component Side-No Net 1" (solid, remove dead copper, pour order 53): 26.674,24.692 43.147,24.692 43.148,24.693 44.577,26.122 44.577,37.719 34.163,37.719 31.623,40.259 31.369,40.513 25.908,40.513
CELL2 on Solder Side "Component Side-No Net 1" (solid, remove dead copper, pour order 51): 34.544,28.155 34.544,26.797 34.844,26.497 37.084,25.019 38.354,25.019 38.354,20.955 39.878,20.955 40.005,20.955 40.132,21.082 40.132,26.289 40.132,29.337 39.497,29.972 39.497,31.496 39.37,31.623 38.354,31.623 38.071,31.623 37.338,30.89 37.182,30.734 35.814,30.734 35.814,29.133 35.978,28.97 35.978,28.231 35.941,28.194
GND on Solder Side "Component Side-No Net 1" (solid, remove dead copper, pour order 49): 22.098,35.433 24.384,35.433 24.384,32.258 24.257,32.131 21.59,32.131
S7.4 on Solder Side "Component Side-No Net 1" (solid, remove dead copper, pour order 27): 32.639,28.321 32.766,28.194 34.544,28.194 34.544,26.797 34.671,26.67 35.306,26.035 36.83,26.035 37.084,26.035 37.211,25.908 37.211,25.146 37.084,25.019 35.814,25.019 33.274,25.019 33.147,25.146 33.147,25.273 33.147,26.67 32.639,27.178
S3.7 on Solder Side "Component Side-No Net 1" (solid, remove dead copper, pour order 13): 33.226,32.052 33.147,31.973 33.147,30.353 33.655,30.353 33.782,30.226 33.909,30.099 35.687,30.099 35.687,28.829 37.338,28.829 37.338,31.115 35.56,31.115 35.56,31.242 34.671,32.131 34.625,32.177 33.008,32.177
3.7V on Solder Side "Component Side-No Net 1" (solid, remove dead copper, pour order 11): 33.02,32.131 34.213,32.131 34.431,31.914 34.431,31.406 34.431,31.228 34.544,31.115 36.068,31.115 36.068,32.639 35.941,32.766 35.433,33.274 33.02,33.274 32.893,33.274 32.766,33.147
3.7V on Solder Side "Component Side-No Net 1" (solid, remove dead copper, pour order 9): 34.417,32.385 34.417,31.242 34.544,31.115 36.068,31.115 36.195,31.115 36.322,31.242 36.449,31.369 36.449,34.925 34.671,34.925 34.417,34.671
3.7V on Solder Side "Component Side-No Net 1" (solid, remove dead copper): 38.012,36.029 19.696,17.713 0.87,17.713 0.87,42.907 1.27,43.307 3.302,45.339 38.481,45.339 38.1,45.339 37.973,45.212
S12 on Component Side "Component Side-No Net 1" (solid, remove dead copper): 30.988,15.494 33.655,15.494 33.782,15.621 33.782,17.018 30.988,17.018
CELL2 on Component Side "Component Side-No Net 1" (solid, remove dead copper, pour order 117): 22.225,7.874 22.225,6.096 22.987,5.334 26.797,5.334 26.797,8.382 26.67,8.509 22.352,8.509
12V on Component Side "Component Side-No Net 1" (solid, remove dead copper, pour order 115): 15.494,15.621 14.859,16.256 14.859,28.321 26.416,28.321 26.924,27.813 29.21,25.527 29.21,16.891 26.416,16.891 26.035,16.51 26.035,12.7 19.177,12.7 18.288,11.811
CELL1 on Component Side "Component Side-No Net 1" (solid, remove dead copper, pour order 113): 20.66,9.992 20.66,8.169 21.336,7.493 21.336,5.461 21.336,3.937 21.59,3.683 21.717,3.556 26.797,3.556 26.797,10.287 27.178,10.668 26.67,11.176 20.574,11.176 21.336,11.176 21.59,10.922
GND on Component Side "Component Side-No Net 1" (solid, remove dead copper, pour order 111): 11.176,37.719 11.684,37.211 17.907,37.211 17.907,31.75 18.161,31.496 18.415,31.242 21.717,31.242 21.971,31.242 22.352,31.623 21.467,32.508 21.467,33.659 21.467,35.556 20.828,36.195 20.828,38.354 24.003,38.354 24.257,38.608 26.67,36.195 26.67,36.068 26.67,29.972 25.654,28.956 24.638,27.94 9.525,27.94
12V on Component Side "Component Side-No Net 1" (solid, remove dead copper, pour order 97): 25.527,11.303 26.035,10.795 26.035,10.287 21.717,10.287 20.447,9.017 20.32,9.144 18.923,9.144 18.923,11.753 19.178,12.008 19.202,11.983 25.27,11.983
GND on Component Side "Component Side-No Net 1" (solid, remove dead copper, pour order 95): -0.254,38.735 -0.254,3.683 1.524,1.905 4.445,-1.016 45.466,-1.016 45.466,40.513 46.228,41.275
CELL3 on Component Side "Component Side-No Net 1" (solid, remove dead copper, pour order 93): 28.448,10.541 30.353,10.541 30.861,11.049 30.607,11.303 30.607,16.256 33.528,16.256 34.29,17.018 34.417,16.891 34.417,9.906 34.417,9.652 33.401,8.636 33.274,8.509 27.686,8.509
12V on Component Side "Component Side-No Net 1" (solid, remove dead copper, pour order 91): 31.115,10.16 19.685,10.033 18.669,11.049 16.51,13.208 16.51,23.368 16.51,25.908 17.653,27.051 18.034,27.432 28.575,27.432 29.845,27.432 31.115,25.527
CELL1 on Component Side "Component Side-No Net 1" (solid, remove dead copper, pour order 89): 18.669,6.223 23.958,6.223 24.257,5.924 24.257,3.429 18.669,3.429
CELL1 on Component Side "Component Side-No Net 1" (solid, remove dead copper, pour order 85): 21.209,9.779 23.114,9.779 23.114,8.245 22.987,7.874 24.003,6.858 24.257,6.858 24.257,3.429 21.082,3.429 20.32,3.429 20.193,3.556 19.685,4.064 19.685,9.779
CELL1 on Component Side "Component Side-No Net 1" (solid, remove dead copper, pour order 83): 32.953,19.05 38.1,19.05 38.1,13.716 38.1,13.208 35.433,10.541 33.528,10.541 32.639,10.541 32.512,10.414
SW2 on Component Side "Component Side-No Net 1" (solid, remove dead copper, pour order 81): 22.225,9.398 22.733,9.398 22.987,9.398 23.114,9.525 23.114,10.16 24.257,10.16 24.511,10.414 24.638,10.541 28.829,10.541 28.829,9.276 28.837,9.267 28.025,8.455 23.237,8.455 22.406,8.455 22.225,8.636
CELL2 on Component Side "Component Side-No Net 1" (solid, remove dead copper, pour order 79): 22.225,8.255 22.408,8.255 25.019,8.255 25.019,7.112 24.765,6.858 23.368,6.858 22.606,7.62 22.352,7.874 22.225,7.874
CELL3 on Component Side "Component Side-No Net 1" (solid, remove dead copper, pour order 77): 28.837,9.267 28.829,9.276 28.829,9.779 30.988,9.779 31.623,10.414 32.512,11.303 32.512,12.827 32.512,14.428 32.549,14.464 32.845,14.761 32.845,14.863 33.616,14.863 34.064,14.414 33.655,14.005 33.655,8.128 28.956,8.128 28.702,7.874
CELL3 on Component Side "Component Side-No Net 1" (solid, remove dead copper, pour order 75): 35.052,15.113 35.052,10.541 35.052,10.414 32.893,8.255 24.511,8.255 23.749,8.255 23.622,8.382 22.479,8.382 22.098,8.382 22.098,8.89 23.622,8.89 24.384,8.89 24.511,8.89 25.019,9.398 29.464,9.398 31.115,9.398 32.131,10.414 32.512,10.795 32.512,15.161
CELL2 on Component Side "Component Side-No Net 1" (solid, remove dead copper, pour order 73): 40.132,21.033 40.132,16.637 40.132,13.081 38.608,11.557 33.909,6.858 24.511,6.858 24.511,8.255 27.178,8.255 32.893,8.255 36.83,12.954 37.211,22.225 40.005,22.225 40.132,22.352
12V on Component Side "Component Side-No Net 1" (solid, remove dead copper, pour order 71): 33.655,15.367 35.814,15.367 35.814,16.637 35.687,16.764 33.655,16.764
S12 on Component Side "Component Side-No Net 1" (solid, remove dead copper, pour order 65): 33.655,16.764 33.655,15.748 33.274,15.748 33.147,15.621 32.131,15.621 32.131,16.891 33.655,16.891
S12 on Component Side "Component Side-No Net 1" (solid, remove dead copper, pour order 63): 35.052,14.859 36.195,14.859 36.449,15.113 37.211,15.113 37.211,14.097 37.084,13.97 36.957,13.843 35.687,13.843 35.179,13.843 35.052,13.97
CELL1 on Component Side "Component Side-No Net 1" (solid, remove dead copper, pour order 61): 26.416,30.988 26.416,25.654 26.416,21.971 27.305,21.082 27.432,20.955 29.718,20.955 29.718,16.764 35.179,16.764 35.56,16.764 35.56,19.177 35.56,24.511 35.052,25.019 29.591,25.019 29.591,31.369 26.67,33.147
GND on Component Side "Component Side-No Net 1" (solid, remove dead copper, pour order 55): 12.573,31.027 12.485,31.115 2.159,31.115 2.159,40.767 5.334,43.942 6.223,44.831 37.973,44.831 37.973,39.751 44.958,32.766 44.704,32.512 44.704,23.495 38.735,23.495 31.115,31.115
GND on Component Side "Component Side-No Net 1" (solid, remove dead copper, pour order 47): 12.573,37.338 17.526,37.338 17.526,33.147 17.78,32.893 17.907,32.766 22.606,32.766 22.606,35.14 22.396,35.35 25.273,35.35 25.273,31.115 25.146,30.988 20.066,30.988 12.7,30.988 12.573,30.861
CELL1 on Component Side "Component Side-No Net 1" (solid, remove dead copper, pour order 45): 26.67,33.147 24.638,33.147 24.638,30.988 26.416,30.988 28.829,30.988 29.591,31.75 29.718,31.877 29.718,33.274
CELL2 on Component Side "Component Side-No Net 1" (solid, remove dead copper, pour order 43): 34.29,32.579 27.238,32.579 26.67,33.147 26.416,33.401 23.622,33.401 23.622,34.036 26.543,34.036 30.353,34.036 30.48,34.163 30.48,35.687 30.226,35.941 30.099,35.814 24.511,35.814 23.241,35.814 23.241,37.338 33.147,37.338 34.29,36.195 34.29,34.544 35.179,34.544 35.306,34.417 35.306,32.385
S3.7 on Component Side "Component Side-No Net 1" (solid, remove dead copper, pour order 41): 34.49,30.407 34.417,30.48 32.639,30.48 32.639,32.258 32.766,32.385 34.456,32.385 34.456,32.219 34.484,32.191 34.435,32.141 34.427,32.141
SW1 on Component Side "Component Side-No Net 1" (solid, remove dead copper, pour order 37): 23.622,34.417 24.384,34.417 24.511,34.417 24.892,34.798 25.019,34.925 25.527,34.925 26.035,34.925 26.162,35.052 26.162,35.56 26.289,35.687 30.48,35.687 30.48,34.163 25.781,34.163 24.765,34.163 24.638,34.036 23.622,34.036
CELL2 on Component Side "Component Side-No Net 1" (solid, remove dead copper, pour order 35): 37.973,28.829 37.719,28.575 34.417,28.575 34.417,27.638 34.597,27.459 38.107,27.459
CELL1 on Component Side "Component Side-No Net 1" (solid, remove dead copper, pour order 33): 35.56,30.114 35.56,28.575 35.179,28.194 33.401,28.194 32.004,28.194 31.75,28.448 31.369,28.829 31.369,31.75 29.591,31.75 29.591,32.512 29.591,32.893 29.718,32.893 33.02,32.893 33.02,30.226 33.274,29.972 33.416,30.114 34.49,30.114
3.7V on Component Side "Component Side-No Net 1" (solid, remove dead copper, pour order 31): 34.671,32.512 34.798,32.385 37.846,32.385 37.846,30.607 37.973,30.48 37.9,30.407 34.49,30.407 34.49,32.185 34.29,32.385
CELL2 on Component Side "Component Side-No Net 1" (solid, remove dead copper, pour order 29): 34.49,26.585 36.618,26.585 37.001,26.968 38.31,26.968 38.31,21.888 38.354,21.844 38.354,20.943 40.132,20.943 40.132,30.861 39.497,32.258 38.354,33.401 37.211,34.544 34.29,34.544 34.29,32.385 37.338,32.385 37.465,32.385 37.592,32.258 37.592,30.226 37.465,30.226 36.322,29.083 36.322,28.194 36.195,28.067 34.671,28.067
7.4V on Component Side "Component Side-No Net 1" (solid, remove dead copper, pour order 25): 35.814,26.177 35.814,25.019 38.1,25.019 38.1,19.05 33.528,19.05 33.147,19.05 33.147,22.987 33.147,26.543 36.053,26.543
S7.4 on Component Side "Component Side-No Net 1" (solid, remove dead copper, pour order 21): 35.814,26.289 36.068,26.289 36.703,26.289 36.957,26.543 38.1,26.543 38.1,25.019 35.814,25.019
CELL2 on Component Side "Component Side-No Net 1" (solid, remove dead copper, pour order 19): 34.417,26.67 34.417,26.543 36.314,26.543 36.322,26.551 36.322,27.686 36.322,28.194 34.29,28.194
S7.4 on Component Side "Component Side-No Net 1" (solid, remove dead copper, pour order 17): 32.766,28.321 33.909,28.321 34.29,27.94 34.29,27.051 32.766,27.051
CELL1 on Component Side "Component Side-No Net 1" (solid, remove dead copper, pour order 15): 33.782,30.099 33.782,29.083 35.814,29.083 35.814,30.353 35.687,30.226 33.782,30.226
3.7V on Component Side "Component Side-No Net 1" (solid, remove dead copper, pour order 7): 34.29,32.385 34.29,30.607 34.544,30.353 35.687,30.353 35.941,30.607 36.322,30.607 36.322,32.385
S3.7 on Component Side "Component Side-No Net 1" (solid, remove dead copper, pour order 5): 35.814,29.845 35.814,29.337 36.068,29.337 36.322,29.083 36.322,28.829 36.449,28.829 37.973,28.829 37.973,30.099 37.084,30.099 36.703,30.099 36.449,29.845
S3.7 on Component Side "Component Side-No Net 1" (solid, remove dead copper, pour order 3): 33.147,32.004 33.147,30.861 33.274,30.734 34.29,30.734 34.29,32.004
GND on Ground Plane (split plane): 22.527,42.802 23.158,42.774 23.788,42.726 24.416,42.659 25.042,42.574 25.665,42.469 26.285,42.346 26.901,42.204 27.512,42.044 28.118,41.865 28.718,41.668 29.312,41.453 29.9,41.22 30.48,40.969 31.052,40.701 31.616,40.416 32.17,40.114 32.716,39.795 33.252,39.46 33.777,39.109 34.292,38.742 34.795,38.36 35.286,37.963 35.765,37.551 36.232,37.125 36.685,36.685 37.125,36.232 37.551,35.765 37.963,35.286 38.36,34.795 38.742,34.292 39.109,33.777 39.46,33.252 39.795,32.716 40.114,32.17 40.416,31.616 40.701,31.052 40.969,30.48 41.22,29.9 41.453,29.312 41.668,28.718 41.865,28.118 42.044,27.512 42.204,26.901 42.346,26.285 42.469,25.665 42.574,25.042 42.659,24.416 42.726,23.788 42.753,23.427 21.538,23.427 7.705,37.26 8.025,37.551 8.504,37.963 8.995,38.36 9.498,38.742 10.013,39.109 10.538,39.46 11.074,39.795 11.62,40.114 12.174,40.416 12.738,40.701 13.31,40.969 13.89,41.22 14.478,41.453 15.072,41.668 15.672,41.865 16.278,42.044 16.889,42.204 17.505,42.346 18.125,42.469 18.748,42.574 19.374,42.659 20.002,42.726 20.632,42.774 21.263,42.802 21.875,42.812 21.895,42.81 21.915,42.812
12V on Ground Plane (split plane): 21.393,23.205 21.435,23.177 21.484,23.168 30.478,23.168 30.478,10.976 30.045,10.543 21.59,10.543 21.54,10.534 21.498,10.506 21.028,10.035 19.866,10.035 17.274,12.627 17.274,24.076 18.898,25.7
CELL1 on Ground Plane (split plane): 163 vertices, not listed, extent 0.978,0.978 42.812,37.083
G3.7 on Power Plane (split plane): 38.225,31.95 38.225,30.407 38.046,30.228 37.721,30.228 37.721,30.424 37.712,30.473 37.684,30.515 36.992,31.207 36.95,31.235 36.901,31.244 35.106,31.244 34.673,31.677 34.673,32.004 34.664,32.054 34.636,32.096 34.382,32.35 34.34,32.378 34.29,32.387 33.274,32.387 33.224,32.378 33.182,32.35 32.928,32.096 32.9,32.054 32.891,32.004 32.891,30.988 32.9,30.938 32.928,30.896 33.182,30.642 33.224,30.614 33.274,30.605 33.601,30.605 33.907,30.299 33.907,30.28 33.601,29.974 33.201,29.974 32.514,30.661 32.514,32.331 32.947,32.764 37.411,32.764
S3.7 on Power Plane (split plane): 34.415,31.95 34.415,31.623 34.424,31.573 34.452,31.531 34.96,31.023 35.002,30.995 35.052,30.986 36.847,30.986 37.463,30.37 37.463,29.01 37.284,28.831 36.249,28.831 36.07,29.01 36.07,29.027 36.07,29.972 36.061,30.022 36.033,30.064 35.652,30.445 35.61,30.473 35.56,30.482 34.09,30.482 33.747,30.826 33.705,30.854 33.655,30.863 33.328,30.863 33.149,31.042 33.149,31.95 33.328,32.129 34.236,32.129
G7.4 on Power Plane (split plane): 38.733,27.124 38.733,24.438 38.427,24.132 32.439,24.132 32.133,24.438 32.133,26.997 32.361,27.225 32.409,27.225 32.674,26.959 32.716,26.931 32.766,26.922 32.966,26.922 33.145,26.743 33.145,24.765 33.154,24.715 33.182,24.673 33.224,24.645 33.274,24.636 37.211,24.636 37.261,24.645 37.303,24.673 37.43,24.8 37.458,24.842 37.467,24.892 37.467,26.108 37.811,26.451 37.839,26.493 37.848,26.543 37.848,26.997 38.154,27.303 38.554,27.303
S7.4 on Power Plane (split plane): 34.034,28.14 34.034,26.543 34.043,26.493 34.071,26.451 34.325,26.197 34.367,26.169 34.417,26.16 37.157,26.16 37.209,26.108 37.209,24.946 37.157,24.894 33.403,24.894 33.403,26.797 33.394,26.847 33.366,26.889 33.112,27.143 33.07,27.171 33.02,27.18 32.82,27.18 32.592,27.408 32.592,28.319 33.855,28.319
7.4V on Power Plane (split plane): 32.293,23.911 32.335,23.883 32.385,23.874 37.844,23.874 37.844,19.612 37.538,19.306 31.877,19.306 31.827,19.297 31.785,19.269 31.757,19.227 31.748,19.177 31.748,16.31 31.442,16.004 30.915,16.004 30.736,16.183 30.736,22.552 32.194,24.01
NetD1_K on Power Plane (split plane): 18.921,35.379 18.921,29.264 17.98,28.323 7.239,28.323 7.189,28.314 7.147,28.286 5.115,26.254 5.087,26.212 5.078,26.162 5.078,17.399 5.087,17.349 5.115,17.307 5.967,16.456 5.967,15.675 5.661,15.369 4.88,15.369 4.066,16.183 4.066,26.489 6.912,29.335 17.526,29.335 17.576,29.344 17.618,29.372 17.999,29.753 18.027,29.795 18.036,29.845 18.036,35.506 18.215,35.685 18.615,35.685
CELL2 on Power Plane (split plane): 411 vertices, not listed, extent 0.978,0.978 42.812,42.812
12V on Power Plane (split plane): 30.741,22.924 30.515,22.698 30.487,22.656 30.478,22.606 30.478,16.129 30.487,16.079 30.515,16.037 30.769,15.783 30.811,15.755 30.861,15.746 31.496,15.746 31.546,15.755 31.588,15.783 31.969,16.164 31.997,16.206 32.006,16.256 32.006,16.889 35.252,16.889 35.304,16.837 35.304,16.383 35.304,16.056 34.96,15.713 34.932,15.671 34.923,15.621 34.923,9.452 34.49,9.019 20.247,9.019 18.925,10.341 18.925,24.001 29.664,24.001

## Keep-outs
Keep-Out Layer:
  circle w0.254: c21.895,21.895 r21.425
  lines w0.254: 35.179,38.608 35.179,38.735

## Other copper
Ground Plane (plane layer: these items are gaps in the copper):
  lines w0.254: 7.249,37.532 21.484,23.297 43.286,23.297 ; 18.923,25.858 18.873,25.858 17.145,24.13 17.145,12.573 19.812,9.906 21.082,9.906 21.59,10.414 30.099,10.414 30.607,10.922 30.607,23.297
Power Plane (plane layer: these items are gaps in the copper):
  rectangle: 33.02,17.018 35.306,19.177
  rectangle: 31.877,17.018 33.274,19.177
  lines w0.254: 1.016,26.543 3.937,26.543 ; 30.861,22.987 29.718,24.13 18.796,24.13 18.796,10.287 20.193,8.89 26.543,8.89 34.544,8.89 35.052,9.398 35.052,15.621 35.433,16.002 35.433,16.383 35.433,16.891 35.306,17.018 31.877,17.018 ; 32.194,24.194 30.607,22.606 30.607,16.129 30.861,15.875 31.496,15.875 31.877,16.256 31.877,19.177 37.592,19.177 37.973,19.558 37.973,24.003 ; 32.462,28.328 32.462,27.355 ; 32.512,28.448 33.909,28.448 34.163,28.194 34.163,26.543 34.417,26.289 35.814,26.289 ; 34.036,28.321 34.417,28.702 36.195,28.702 ; 35.687,26.289 37.211,26.289 37.338,26.162 ; 36.322,32.893 36.322,34.29 38.012,35.98 38.012,36.029 ; 37.592,30.099 38.1,30.099 38.354,30.353 38.354,32.004 37.465,32.893 32.893,32.893 32.385,32.385 32.385,30.607 33.147,29.845 33.655,29.845 34.036,30.226 34.036,30.353 ; 3.937,26.543 6.858,29.464 17.526,29.464 17.907,29.845 17.907,35.56 18.161,35.814 18.669,35.814 19.05,35.433 19.05,29.21 18.034,28.194 7.239,28.194 5.207,26.162 5.207,17.399 6.096,16.51 6.096,15.621 5.715,15.24 4.826,15.24 3.937,16.129 3.937,26.543 ; 32.462,27.355 32.308,27.355 32.004,27.051 32.004,24.384 32.385,24.003 38.481,24.003 38.862,24.384 38.862,27.178 38.608,27.432 38.1,27.432 37.719,27.051 37.719,26.543 37.338,26.162 ; 32.462,27.355 32.766,27.051 33.02,27.051 33.274,26.797 33.274,24.765 37.211,24.765 37.338,24.892 37.338,26.162 ; 34.036,30.353 35.56,30.353 35.941,29.972 35.941,29.027 35.941,28.956 36.195,28.702 ; 34.036,30.353 33.655,30.734 33.274,30.734 33.02,30.988 33.02,32.004 33.274,32.258 34.29,32.258 34.544,32.004 34.544,31.623 35.052,31.115 36.901,31.115 37.592,30.424 37.592,28.956 37.338,28.702 36.195,28.702

## Silkscreen, mask and mechanical layers (free items; w line width, h text height)
Top Overlay:
  text "By:" at 15.24,38.862 h2.54
  text "Restoner_35" at 19.812,38.862 h2.54
  text "G" at 10.795,33.02 h2.54
  text "Project" at 6.604,29.083 h2.54
  text "3V7" at 26.035,28.194 h2
  text "Difftorch" at 5.588,27.178 h2.54
  text "Extreme" at 6.604,25.527 h2.54
  text "7V4" at 39.878,25.527 h2 r90
  text "1-2S" at 9.398,22.098 h2.54
  text "V+" at 29.337,20.447 h2.54 r90
  text "2-3S" at 9.271,20.066 h2.54
  text "3S Li-iON" at 4.826,17.145 h2.54
  text "Battery" at 6.096,15.24 h2.54
  text "Balancer" at 5.207,13.208 h2.54
  text "JLCJLCJLC" at 19.685,11.811 h2.54
  text "G" at 10.668,9.271 h2.54
  text "12V" at 31.242,8.636 h2
  text "V1.0" at 19.304,2.54 h2.54
Bottom Overlay:
  circle w0.254: c28.308,10.788 r8
  circle w0.254: c28.307,33.002 r8
  circle w0.254: c9.07,21.895 r8
  circle w1.5: c21.895,21.895 r3.746
  text "-" at 27.94,38.735 h5
  text "Batt1" at 38.354,34.544 h2.54 r90
  text "Batt0" at 11.303,30.353 h2.54
  text "21700(>20A)" at 39.878,26.924 h2.03 r90
  text "+" at 7.874,26.67 h5
  text "-" at 27.813,25.146 h5
  text "Only" at 41.783,23.495 h2.03 r90
  text "+" at 27.432,15.875 h5
  text "Batt2" at 38.227,13.97 h2.54 r90
  text "+" at 7.874,13.843 h5
  text "+" at 27.559,2.54 h5
Bottom Solder:
  lines w1: 15.621,28.067 18.923,31.369 19.685,31.369 ; 16.764,26.797 19.685,29.718 19.812,29.718